# Altium PCB GSM防火防盗.PcbDoc
Units mil, origin at the board's own origin, x right, y up, seen from the top; angles counter-clockwise.
Board outline 3805 x 5685 mil, 2 copper layers (Top Layer, Bottom Layer); 32 components, 39 nets, 163 pads, 0 vias.
Unrouted connection lines stored in the file: 10.
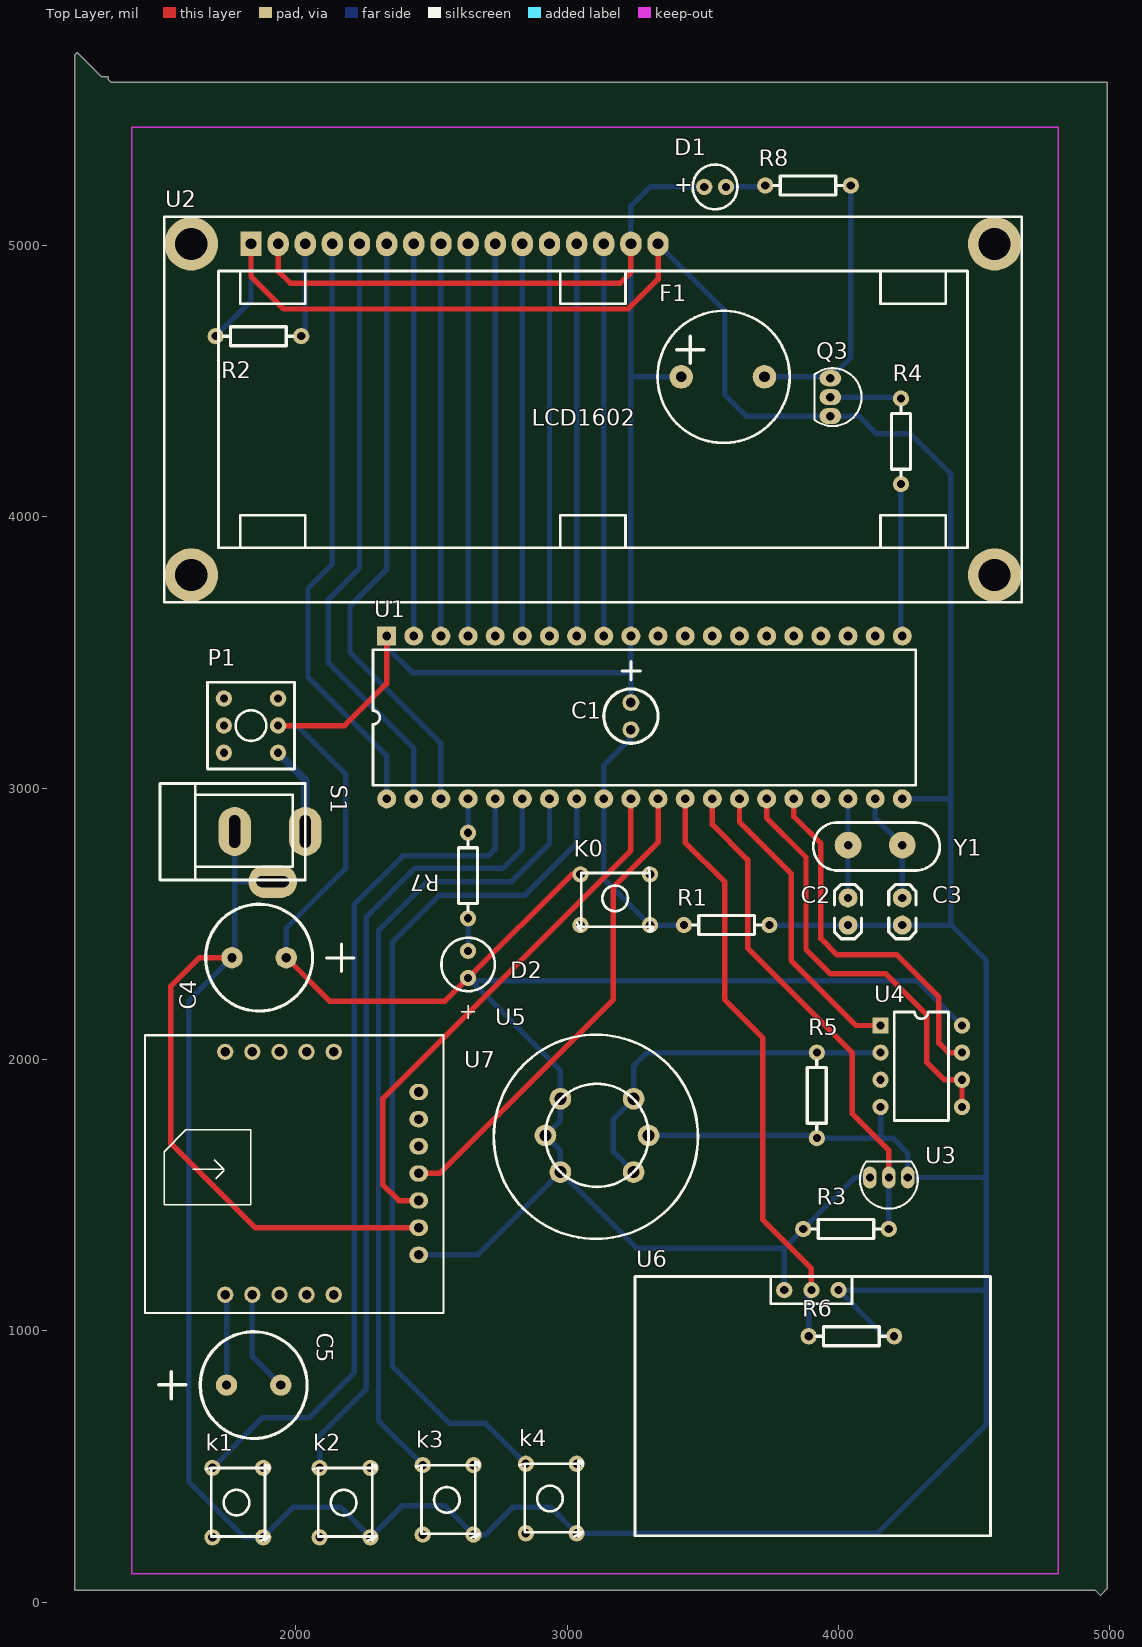
[diagram p0: Top Layer view]
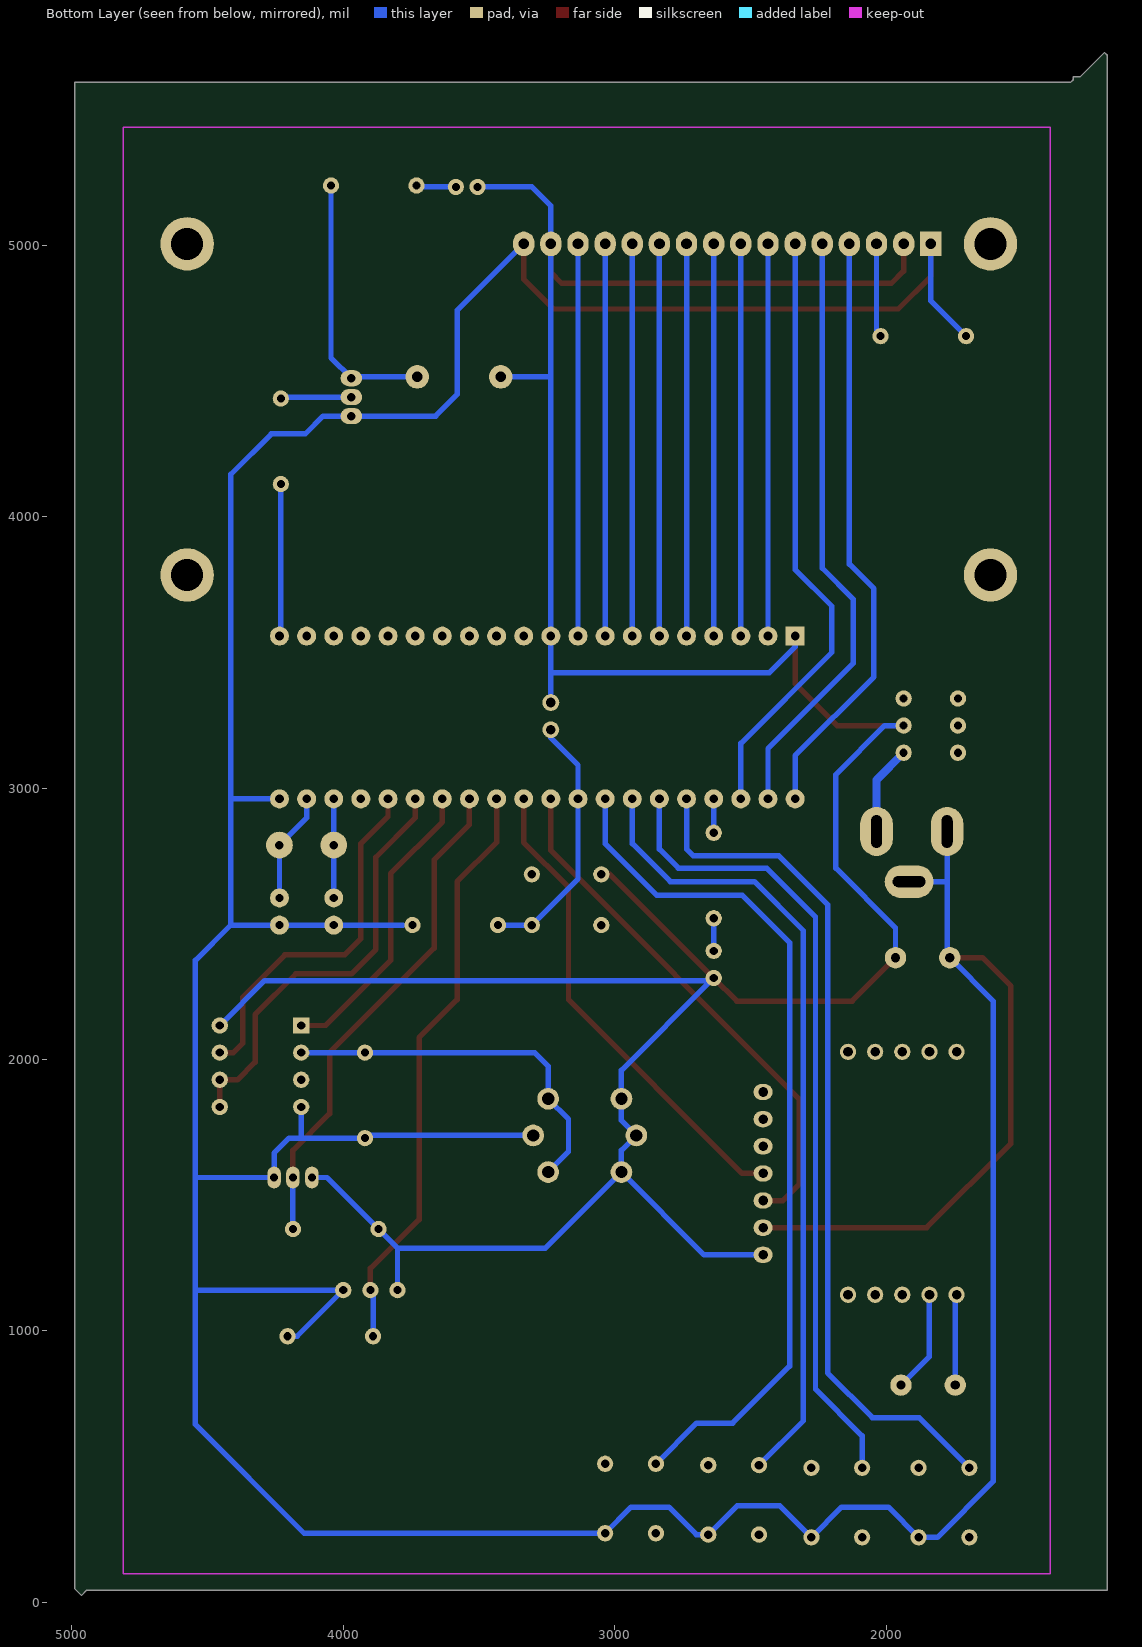
[diagram p1: Bottom Layer view, seen from below]

## Layer stack, top to bottom
Top Layer: signal copper 1.4
Dielectric: dielectric 12.6, FR-4, Dk 4.8
Bottom Layer: signal copper 1.4

## Board outline
1310,5610 1320,5600 4990,5600 4990,50 4965,25 4945,45 1185,45 1185,5700 1195,5710 1285,5620 1310,5620

## Design rules (kind name [scope] priority, off if disabled: settings)
Clearance [All] p1: gap=10
PolygonConnect [All] p1: connectstyle=Relief reliefconductorwidth=10 reliefentries=4 polygonreliefangle="90 Angle"
RoutingVias [All] p1: holewidth=28 width=50 viastyle="Through Hole" minholewidth=28 minwidth=50 maxholewidth=28 maxwidth=50
SilkscreenOverComponentPads [All] p1: minsilkscreentomaskgap=10
SolderMaskExpansion [All] p1: expansion=4
Width [All] p1: maxlimit=30 minlimit=10 preferedwidth=20
27 further rules are at their usual default settings.

## Components (designator, comment, footprint, x,y, rotation, side; value= is the part's Value field where it differs from the comment)
C1 "10uf" 电容-电解10UF 3235,3315 r270 top
C2 "22PF" 电容-瓷片 4035,2495 r90 top
C3 "22PF" 电容-瓷片 4235,2495 r90 top
C4 "1000uf" "电容-电解1000UF - 25V" 1965,2375 r180 top
C5 "1000uf" "电容-电解1000UF - 25V" 1745,800 r0 top
D1 "LED" LED 3505,5215 r0 top
D2 "LED-绿" LED-5MM 2635,2250 r90 top
F1 "蜂鸣器" 蜂鸣器 3420,4515 r0 top
K0 "按键" 按键 3305,2495 r0 top
k1 "按键" 按键 1880,495 r90 top
k2 "按键" 按键 2275,495 r90 top
k3 "按键" 按键 2655,505 r90 top
k4 "按键" 按键 3035,510 r90 top
P1 "自锁开关" 自锁开关 1735,3330 r270 top
Q3 "PNP三极管" 三极管#1 3970,4510 r0 top
R1 "10K" 电阻 3385,2495 r0 top
R2 "2K" 电阻 2065,4665 r180 top
R3 "10K" 电阻 4230,1375 r180 top
R4 "1K" 电阻 4230,4480 r270 top
R5 "10K" 电阻 3920,1665 r90 top
R6 "10K" 电阻 3845,980 r0 top
R7 "1K" 电阻 2635,2880 r270 top
R8 "1K" 电阻 3685,5220 r0 top
S1 "电源接口-大" 电源座-大 2035,2840 r0 top
U1 "STC89C52" 底座40P 2335,2960 r90 top
U2 "LCD1602" LCD1602 1835,5005 r0 top
U3 "DS18B20" 三极管#2 4255,1565 r270 top
U4 "ADC0832" 底座8P 4155,2125 r0 top
U5 "MQ-2" MQ-2 3110,1720 r0 top
U6 "人体感应模块" 人体感应模块 3900,1150 r0 top
U7 "SIM800C" SIM800C 2690,3110 r270 top
Y1 "11.0592MHz" 晶振 4035,2790 r0 top

## Footprints (in the part's own frame and the unit in brackets; to place one, negate y for a bottom-side part, rotate by r counter-clockwise, add the part's x,y. Pads: shape width x height; smd on the part's side, far side on the other; paste and mask are expansions set on the pad)
LCD1602 [mm]
  round 5 hole 3: 0(-5.588,-30.988) 0(-5.588,0) 0(69.596,-30.988) 0(69.596,0)
  rect 2x2.3 hole 1: 1(0,0)
  oval 2x2.3 hole 1: 2(2.54,0) 3(5.08,0) 4(7.62,0) 5(10.16,0) 6(12.7,0) 7(15.24,0) 8(17.78,0) 9(20.32,0) 10(22.86,0) 11(25.4,0) 12(27.94,0) 13(30.48,0) 14(33.02,0) 15(35.56,0) 16(38.1,0)
  silkscreen extent -8.13,-33.53 72.14,2.54
LED [mil]
  round 60 hole 30: 1(0,0) 2(80,0)
  silkscreen extent -42,-82 122,82
LED-5MM [mil]
  round 60 hole 30: 1(50,0) 2(150,0)
  silkscreen extent -100,-98 198,98
MQ-2 [mil]
  round 80 hole 45: 1(-135,135) 2(-190,0) 3(-135,-135) 4(135,-135) 5(190,0) 6(135,135)
  silkscreen extent -380,-381 372,371
SIM800C [mil]
  round 60 hole 35.5: 1(1082,-550) 2(1082,-650) 3(1082,-750) 4(1082,-850) 5(1082,-950) 6(1977,-950) 7(1977,-850) 8(1977,-750) 9(1977,-650) 10(1977,-550)
  oval 60x70 hole 35.5: 11(1830,-237) 12(1730,-237) 13(1630,-237) 14(1530,-237) 15(1430,-237) 16(1330,-237) 17(1230,-237)
  silkscreen extent 1021,-1245 2044,-145
三极管#1 [mm]
  oval 2.032x1.5 hole 0.8: 1(0,0) 2(0,-1.77) 3(0,-3.548)
  silkscreen extent -1.49,-4.48 2.92,0.94
三极管#2 [mm]
  oval 2.032x1.27 hole 0.762: 1(0,0) 2(0,-1.77) 3(0,-3.548)
  silkscreen extent -1.49,-4.48 2.92,0.94
人体感应模块 [mil]
  round 60 hole 30: 1(-100,0) 2(0,0) 3(100,0)
  silkscreen extent -650,-905 660,50
底座8P [mil]
  rect 60x60 hole 30: 1(0,0)
  round 60 hole 30: 2(0,-100) 3(0,-200) 4(0,-300) 5(300,-300) 6(300,-200) 7(300,-100) 8(300,0)
  silkscreen extent 50,-350 250,50
底座40P [mil]
  round 70 hole 32: 1(0,0) 2(0,-100) 3(0,-200) 4(0,-300) 5(0,-400) 6(0,-500) 7(0,-600) 8(0,-700) 9(0,-800) 10(0,-900) 11(0,-1000) 12(0,-1100) 13(0,-1200) 14(0,-1300) 15(0,-1400) 16(0,-1500) 17(0,-1600) 18(0,-1700) 19(0,-1800) 20(0,-1900) 21(600,-1900) 22(600,-1800) 23(600,-1700) 24(600,-1600) 25(600,-1500) 26(600,-1400) 27(600,-1300) 28(600,-1200) 29(600,-1100) 30(600,-1000) 31(600,-900) 32(600,-800) 33(600,-700) 34(600,-600) 35(600,-500) 36(600,-400) 37(600,-300) 38(600,-200) 39(600,-100)
  rect 70x70 hole 32: 40(600,0)
  silkscreen extent 50,-1950 550,50
按键 [mil]
  round 60 hole 32: 1(-255.91,187.01) 1(0,187.01) 2(-255.91,0) 2(0,0)
  silkscreen extent -268,-22 12,212
晶振 [mm]
  round 2.5 hole 0.8: 1(0,0) 2(5.08,0)
  silkscreen extent -3.25,-2.38 8.58,2.11
电容-瓷片 [mil]
  round 70 hole 30: 1(0,0) 2(100,0)
  silkscreen extent -50,-50 150,50
电容-电解10UF [mil]
  round 62 hole 35.43: 1(0,0) 2(100,0)
  silkscreen extent -152,-100 150,100
"电容-电解1000UF - 25V" [mm]
  round 2 hole 0.864: 1(0,0) 2(5.08,0)
  silkscreen extent -6.34,-5 7.54,5
电源座-大 [mil]
  oval 120x180 hole 40 slot 120 at 90 deg: 1(0,0) 2(-260,0)
  oval 180x120 hole 40 slot 120 at 0 deg: 3(-120,-185)
  silkscreen extent -535,-179 0,177
电阻 [mil]
  round 60 hole 30: 1(45,0) 2(360,0)
  silkscreen extent 75,-35 330,35
自锁开关 [mil]
  round 60 hole 30: 1(0,0) 2(100,0) 3(200,0) 4(0,200) 5(100,200) 6(200,200)
  silkscreen extent -60,-60 260,260
蜂鸣器 [mm]
  round 2.2 hole 1: 1(0,0) 2(7.8,0)
  silkscreen extent -2.2,-6.18 10.16,6.18

## Part data
C1: library part 电解电容
C2 C3: library part 瓷片电容
C4 C5: library part 电解电容-1000uf-25v
D2: library part LED-5MM
R1 R2 R3 R4 R5 R6 R7 R8: library part 电阻-定值
Y1: library part 晶振

## Nets (pads, with @x,y where several pads share a name; then routed paths per layer and width w, separated by ;. In a path a pad name is that pad's centre, name@x,y a point inside that pad or via, vN(x,y) a via of type N, cw(c..) or ccw(c..) an arc to the next point about the centre after c; other vN are vias at no path point)
B0: U1.39 U2.7 | length 1445
  Bottom Layer w20: U1.39 U2.7
B1: U1.38 U2.8 | length 1445
  Bottom Layer w20: U1.38 U2.8
B2: U1.37 U2.9 | length 1445
  Bottom Layer w20: U1.37 U2.9
B3: U1.36 U2.10 | length 1445
  Bottom Layer w20: U1.36 U2.10
B4: U1.35 U2.11 | length 1445
  Bottom Layer w20: U1.35 U2.11
B5: U1.34 U2.12 | length 1445
  Bottom Layer w20: U1.34 U2.12
B6: U1.33 U2.13 | length 1445
  Bottom Layer w20: U1.33 U2.13
B7: U1.32 U2.14 | length 1445
  Bottom Layer w20: U1.32 U2.14
EN: U1.3 U2.6 | length 2239.7
  Bottom Layer w20: U2.6 2335,3805 2200,3670 2200,3500 2535,3165 U1.3
GND: C2.1 C3.1 C4.2 k1.2 k2.2 k3.2 k4.2 Q3.3 R1.2 R2.2 R5.1 R6.2 S1.2 S1.3 U1.20 U2.1 U2.16 U3.1 U4.4 U5.5 U6.3 U7.12 | length 18473.8
  Top Layer w20: C4.2 1645,2375 1540,2270 1540,1690 1850,1380 U7.12 ; U2.1 1835,4885 1955,4765 3225,4765 3335,4875 U2.16
  Bottom Layer w20: R2.2 1835,4795 U2.1 ; S1.2 1775,2650 ; S1.3 1780,2655 1775,2650 ; U5.5 3910,1720 R5.1 4155,1710 ; U2.16 3580,4760 3580,4450 3659.68,4370.31 Q3.3 4074.68,4370.31 4140,4305 4265,4305 4413.75,4156.25 4413.75,2955 ; 3780,2495 C2.1 C3.1 4413.75,2495 4413.75,2496.25 ; U4.4 4155,1710 ; R6.2 4170,980 U6.3 4545,1150 ; U1.20 4408.75,2960 4413.75,2955 ; 1775,2650 1775,2385 C4.2 1605,2215 1605,445 1810.91,239.09 1880,239.09 1990.91,350 2164.09,350 2275,239.09 2390.91,355 2549.09,355 2655,249.09 2699.09,249.09 2800,350 2939.09,350 3035,254.09 4144.09,254.09 4545,655 4545,1150 ; 4155,1710 4200,1710 4255,1655 U3.1 4545,1565 ; 4413.75,2496.25 4413.75,2955 ; 4413.75,2496.25 4545,2365 4545,1565 ; 4545,1150 4545,1565
NetC1_2: C1.2 K0.2 R1.1 U1.9 | length 956.8
  Bottom Layer w20: C1.2 3235,3185 3135,3085 U1.9 3135,2665 3305,2495 R1.1
NetC2_2: C2.2 U1.18 Y1.1 | length 365
  Bottom Layer w20: C2.2 Y1.1 U1.18
NetC3_2: C3.2 U1.19 Y1.2 | length 406.4
  Bottom Layer w20: U1.19 4135,2890 Y1.2 C3.2
NetC5_1: C5.1 U7.6 | length 335.1
  Bottom Layer w20: U7.6 1745,1128 C5.1
NetC5_2: C5.2 U7.7 | length 376.5
  Bottom Layer w20: U7.7 1840,905 C5.2
NetD1_2: D1.2 R8.1 | length 147.1
  Bottom Layer w20: D1.2 3725,5215 R8.1
NetD2_2: D2.2 R7.2 | length 120
  Bottom Layer w20: D2.2 R7.2
NetF1_2: F1.2 Q3.1 R8.2 | length 986.1
  Bottom Layer w20: F1.2 3965,4515 Q3.1 4045,4585 R8.2
NetP1_6: P1.6 S1.1 | length 331.4
  Bottom Layer w30: P1.6 2035,3030 S1.1
NetQ3_2: Q3.2 R4.1 | length 255.1
  Bottom Layer w20: Q3.2 R4.1@4224.69,4440.31 ; R4.1@4229.69,4435.31 R4.1
NetR2_1: R2.1 U2.3 | length 346.2
  Bottom Layer w20: R2.1 2035,4680 U2.3
NetR5_2: R5.2 U4.2 U5.4 U5.6 | length 1382.8
  Bottom Layer w20: U5.4 3170,1660 3170,1780 U5.6 3245,1975 3295,2025 R5.2 U4.2
P13: R7.1 U1.4 | length 125
  Bottom Layer w20: R7.1 U1.4
P14: k1.1 U1.5 | length 3181.9
  Bottom Layer w20: k1.1@1692.99,495 1877.99,680 2050,680 2215,845 2215,2570 2395,2750 2710,2750 2735,2775 U1.5
P15: k2.1 U1.6 | length 2964.8
  Bottom Layer w20: k2.1@2087.99,495 2087.99,612.99 2260,785 2260,2525 2440,2705 2765,2705 2835,2775 U1.6
P16: k3.1 U1.7 | length 2965.1
  Bottom Layer w20: k3.1@2467.99,505 2305,667.99 2305,2475 2485,2655 2795,2655 2935,2795 U1.7
P17: k4.1 U1.8 | length 3198.3
  Bottom Layer w20: k4.1@2847.99,510 2697.99,660 2565,660 2355,870 2355,2430 2530,2605 2845,2605 3035,2795 U1.8
P20: R4.2 U1.21 | length 562.1
  Bottom Layer w20: R4.2 4230,3565 U1.21
P30: U1.10 U7.13 | length 1956.9
  Top Layer w20: U7.13 2380,1480 2320,1540 2320,1855 3235,2770 U1.10
P31: U1.11 U7.14 | length 1790.4
  Top Layer w20: U7.14 2530,1580 3170,2220 3170,2635 3335,2800 U1.11
P32: R6.1 U1.12 U6.2 | length 2181.8
  Top Layer w20: U1.12 3435,2800 3580,2655 3580,2220 3720,2080 3720,1410 3900,1230 U6.2
  Bottom Layer w20: R6.1@3890,975 3890,1140 U6.2
P33: R3.1 U1.13 U3.2 | length 1854.5
  Top Layer w20: U1.13 3535,2865 3665,2735 3665,2410 4050,2025 4050,1800 4185.31,1664.68 U3.2
  Bottom Layer w20: R3.1 4185.31,1375.32 U3.2
P34: U1.14 U4.1 | length 1103.1
  Top Layer w20: U1.14 3635,2875 3825,2685 3825,2365 4065,2125 U4.1
P35: U1.15 U4.5 U4.6 | length 1591.4
  Top Layer w20: U1.15 3735,2890 3880,2745 3880,2405 3970,2315 4175,2315 4325,2165 4325,1990 4390,1925 U4.6 U4.5
P36: U1.16 U4.7 | length 1350
  Top Layer w20: U1.16 3835,2895 3935,2795 3935,2445 3995,2385 4215,2385 4370,2230 4370,2060 4405,2025 U4.7
P37: U1.17
RS: U1.1 U2.4 | length 2202.4
  Bottom Layer w20: U2.4 2135,3825 2045,3735 2045,3410 2335,3120 U1.1
RW: U1.2 U2.5 | length 2223.1
  Bottom Layer w20: U2.5 2235,3810 2120,3695 2120,3460 2435,3145 U1.2
VCC: C1.1 C4.1 D1.1 D2.1 F1.1 K0.1 P1.5 R3.2 U1.31 U1.40 U2.2 U2.15 U3.3 U4.8 U5.1 U5.2 U5.3 U6.1 U7.11 | length 12857.2
  Top Layer w20: P1.5 2180,3230 2335,3385 U1.40 ; U2.2 1935,4905 1980,4860 3195,4860 3235,4900 U2.15 ; C4.1 2125,2215 2550,2215 D2.1 3017.01,2682.01 K0.1@3049.09,2682.01
  Bottom Layer w20: P1.5 2005,3230 2185,3050 2185,2705 1965,2485 C4.1 ; U1.40 2335,3520 2430,3425 3230,3425 ; U7.11 2670,1280 U5.3 ; C1.1@3235,3295 U1.31 3235,4510 ; F1.1 3240,4515 3235,4510 ; D1.1 3305,5215 3235,5145 U2.15 3235,4510 ; U6.1 3800,1305 ; U3.3 4060,1565 R3.2 3800,1305 ; U4.8 4290,2290 2645,2290 2975,1960 U5.1 2975,1775 U5.2 2975,1665 U5.3 ; U5.3 3255,1305 3800,1305
pads on no net: P1.1 P1.2 P1.3 P1.4 U1.22 U1.23 U1.24 U1.25 U1.26 U1.27 U1.28 U1.29 U1.30 U2.0 U4.3 U7.1 U7.2 U7.3 U7.4 U7.5 U7.8 U7.9 U7.10 U7.15 U7.16 U7.17

## Keep-outs
Keep-Out Layer:
  lines w5: 1395,105 1395,5435 4810,5435 4810,105 1395,105

## Text inside footprints (layer, text, board x,y; h text height)
D1: Top Overlay "+" at 3395,5195 h60